# Altium PCB SHORTFINDER.PcbDoc
Units mm, origin at the board's own origin, x right, y up, seen from the top; angles counter-clockwise.
Board outline 152.4 x 101.6 mm, 2 copper layers (Top Layer, Bottom Layer); 39 components, 0 nets, 626 pads, 0 vias.
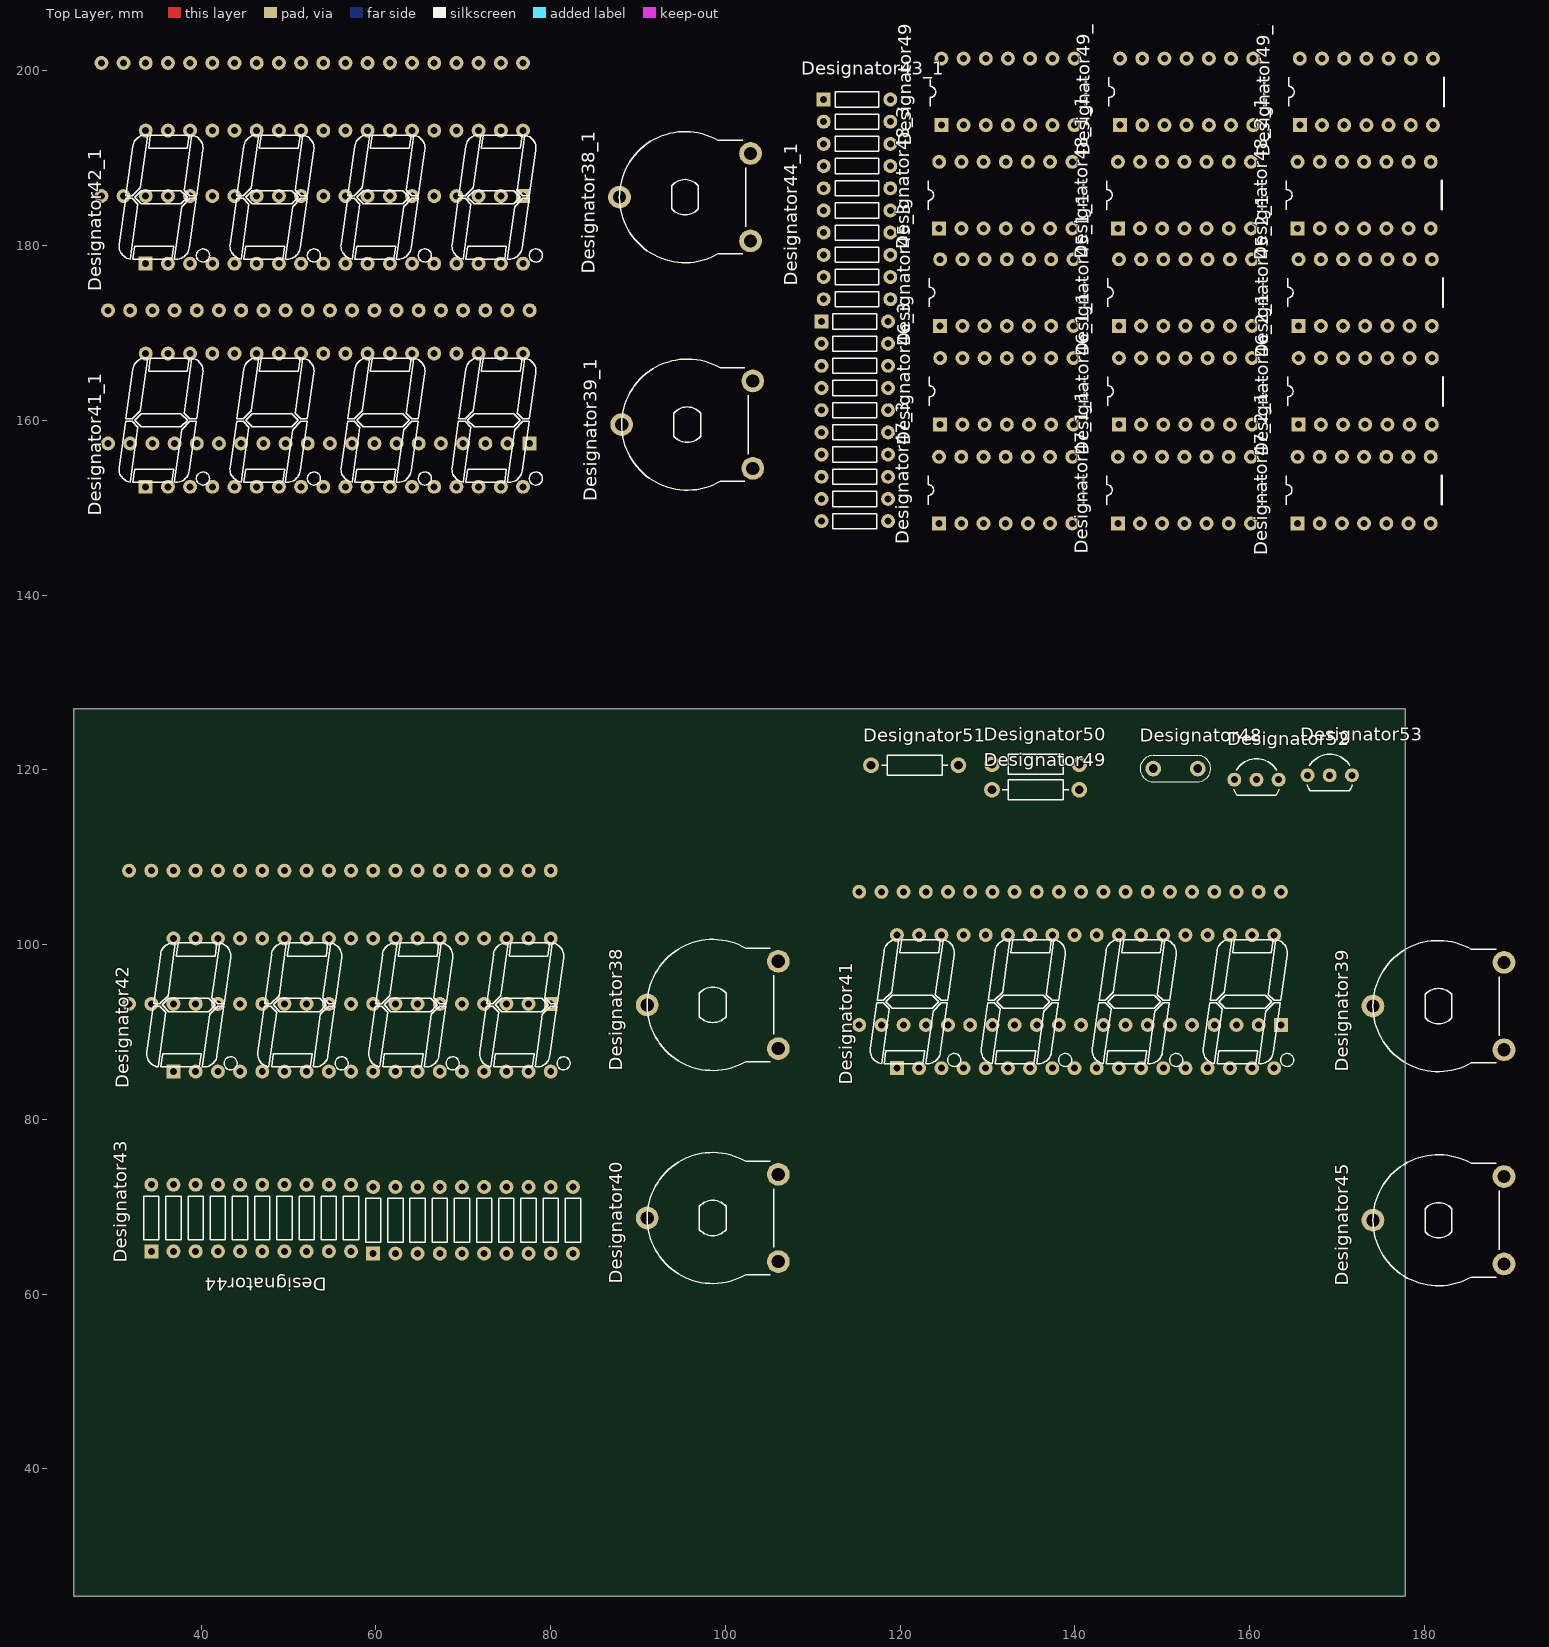
[diagram p0: Top Layer view]
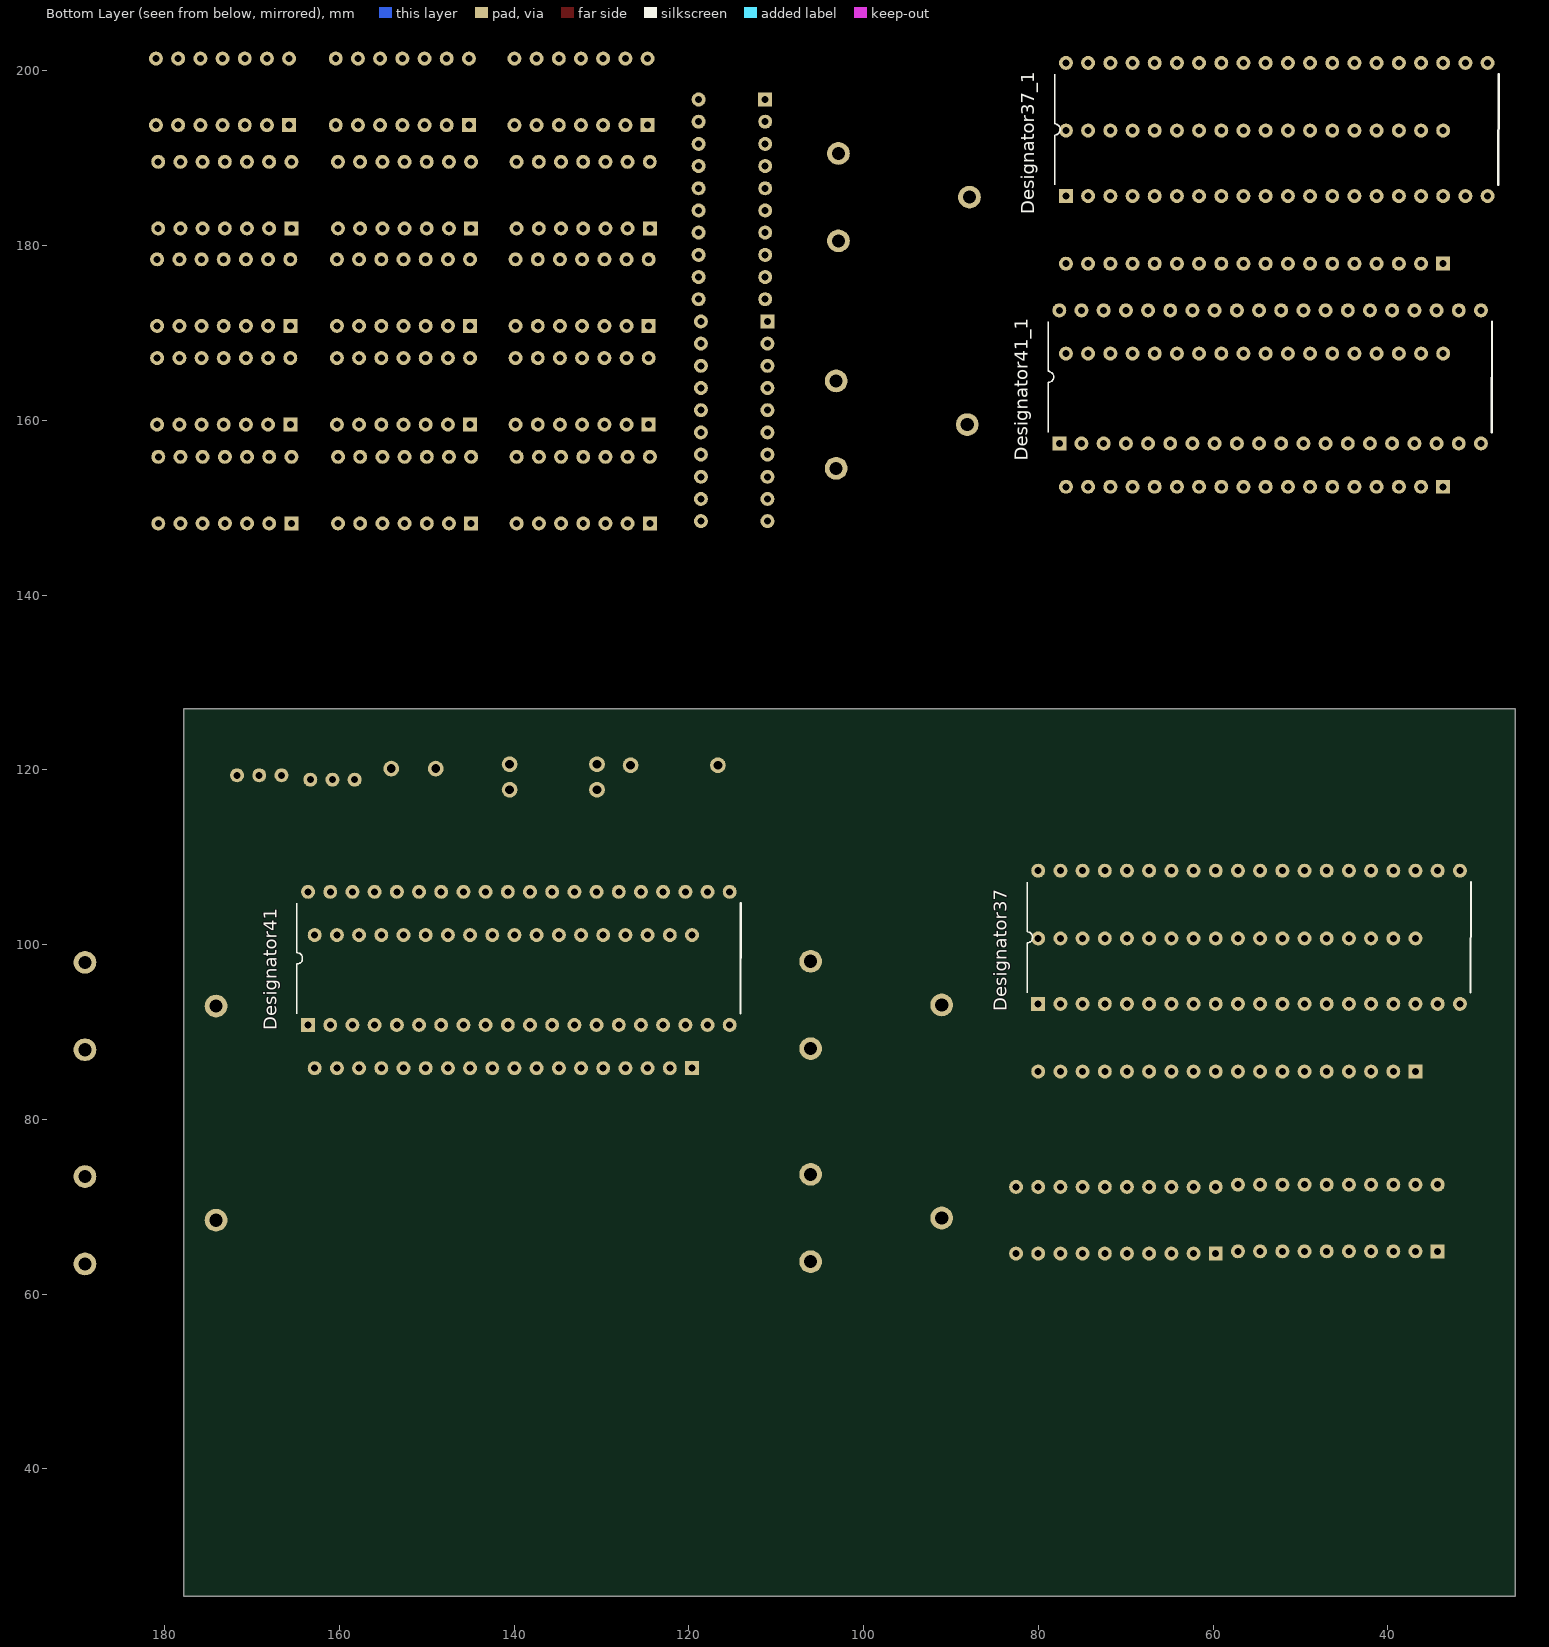
[diagram p1: Bottom Layer view, seen from below]

## Layer stack, top to bottom
Top Solder: solder mask 0.0102, Solder Resist, Dk 3.5
Top Layer: signal copper 0.0356
Dielectric 1: dielectric 0.32, FR-4, Dk 4.8
Bottom Layer: signal copper 0.0356
Bottom Solder: solder mask 0.0102, Solder Resist, Dk 3.5

## Board outline
25.4,25.4 177.8,25.4 177.8,127 25.4,127

## Design rules (kind name [scope] priority, off if disabled: settings)
Clearance [All] p1: gap=0.254 ignorepadtopadclearanceinfootprint=FALSE
PolygonConnect [All] p1: connectstyle=Relief reliefconductorwidth=0.254 reliefentries=4 polygonreliefangle="90 Angle" airgapwidth=0.254
RoutingVias [All] p1: holewidth=0.711 width=1.27 viastyle="Through Hole" minholewidth=0.711 minwidth=1.27 maxholewidth=0.711 maxwidth=1.27
SolderMaskExpansion [All] p1: expansion=0.102 istentingtop=FALSE
Width [All] p1: maxlimit=0.254 minlimit=0.254 preferedwidth=0.254
30 further rules are at their usual default settings.

## Components (designator, comment, footprint, x,y, rotation, side; value= is the part's Value field where it differs from the comment)
Designator37 "Comment" DIP40W 55.88,100.838 r90 bottom
Designator37_1 "Comment" DIP40W 52.705,193.294 r90 bottom
Designator38 "Comment" POT-PIHER-PTNV15 98.552,93.091 r90 top
Designator38_1 "Comment" POT-PIHER-PTNV15 95.377,185.547 r90 top
Designator39 "Comment" POT-PIHER-PTNV15 181.61,92.964 r90 top
Designator39_1 "Comment" POT-PIHER-PTNV15 95.631,159.512 r90 top
Designator40 "Comment" POT-PIHER-PTNV15 98.552,68.707 r90 top
Designator41 "Comment" DISPLAY-LED-QUAD7 141.224,93.472 r90 top
Designator41 "Comment" DIP40W 139.446,98.425 r90 bottom
Designator41_1 "Comment" DIP40W 53.467,164.973 r90 bottom
Designator41_1 "Comment" DISPLAY-LED-QUAD7 55.245,160.02 r90 top
Designator42 "Comment" DISPLAY-LED-QUAD7 58.42,93.091 r90 top
Designator42_1 "Comment" DISPLAY-LED-QUAD7 55.245,185.547 r90 top
Designator43 "Comment" LED-BAR-10X 45.72,68.707 r90 top
Designator43_1 "Comment" LED-BAR-10X 115.062,185.293 r0 top
Designator44 "Comment" LED-BAR-10X 71.12,68.453 r90 top
Designator44_1 "Comment" LED-BAR-10X 114.808,159.893 r0 top
Designator45 "Comment" POT-PIHER-PTNV15 181.61,68.453 r90 top
Designator45_1_1 "Comment" DIP14 152.654,174.625 r90 top
Designator45_2_1 "Comment" DIP14 173.228,174.625 r90 top
Designator45_3 "Comment" DIP14 132.207,174.625 r90 top
Designator46_1_1 "Comment" DIP14 152.654,163.322 r90 top
Designator46_2_1 "Comment" DIP14 173.228,163.322 r90 top
Designator46_3 "Comment" DIP14 132.207,163.322 r90 top
Designator47_1_1 "Comment" DIP14 152.527,152.019 r90 top
Designator47_2_1 "Comment" DIP14 173.101,152.019 r90 top
Designator47_3 "Comment" DIP14 132.08,152.019 r90 top
Designator48 "Comment" CAP-CER-5MM 151.511,120.142 r0 top
Designator48_1_1 "Comment" DIP14 152.534,185.783 r90 top
Designator48_2_1 "Comment" DIP14 173.108,185.783 r90 top
Designator48_3 "Comment" DIP14 132.087,185.783 r90 top
Designator49 "Comment" RES-10MM 135.509,117.729 r0 top
Designator49_1_1 "Comment" DIP14 152.788,197.594 r90 top
Designator49_2_1 "Comment" DIP14 173.362,197.594 r90 top
Designator49_3 "Comment" DIP14 132.341,197.594 r90 top
Designator50 "Comment" RES-10MM 135.509,120.65 r0 top
Designator51 "Comment" RES-10MM 121.666,120.523 r0 top
Designator52 "Comment" TO92A 160.782,118.872 r0 top
Designator53 "Comment" TO92A 169.164,119.38 r0 top

## Footprints (in the part's own frame and the unit in brackets; to place one, negate y for a bottom-side part, rotate by r counter-clockwise, add the part's x,y. Pads: shape width x height; smd on the part's side, far side on the other; paste and mask are expansions set on the pad)
CAP-CER-5MM [mm]
  round 1.8 hole 1 mask+0.1: 1(-2.54,0) 2(2.54,0)
  silkscreen extent -4.04,-1.5 4.04,1.5, body extent -2.8,-1.25 2.8,1.25, height 5.5
DIP14 [mm]
  rect 1.6x1.6 hole 0.8 mask+0.1: 1(-3.81,7.62)
  round 1.6 hole 0.8 mask+0.1: 2(-3.81,5.08) 3(-3.81,2.54) 4(-3.81,0) 5(-3.81,-2.54) 6(-3.81,-5.08) 7(-3.81,-7.62) 8(3.81,-7.62) 9(3.81,-5.08) 10(3.81,-2.54) 11(3.81,0) 12(3.81,2.54) 13(3.81,5.08) 14(3.81,7.62)
  silkscreen extent -1.65,-8.89 1.65,8.89, body extent -3.93,-9.8 3.94,9.8, height 4.36
DIP40W [mm]
  rect 1.6x1.6 hole 0.8 mask+0.1: 1(-7.62,24.13)
  round 1.6 hole 0.8 mask+0.1: 2(-7.62,21.59) 3(-7.62,19.05) 4(-7.62,16.51) 5(-7.62,13.97) 6(-7.62,11.43) 7(-7.62,8.89) 8(-7.62,6.35) 9(-7.62,3.81) 10(-7.62,1.27) 11(-7.62,-1.27) 12(-7.62,-3.81) 13(-7.62,-6.35) 14(-7.62,-8.89) 15(-7.62,-11.43) 16(-7.62,-13.97) 17(-7.62,-16.51) 18(-7.62,-19.05) 19(-7.62,-21.59) 20(-7.62,-24.13) 21(7.62,-24.13) 22(7.62,-21.59) 23(7.62,-19.05) 24(7.62,-16.51) 25(7.62,-13.97) 26(7.62,-11.43) 27(7.62,-8.89) 28(7.62,-6.35) 29(7.62,-3.81) 30(7.62,-1.27) 31(7.62,1.27) 32(7.62,3.81) 33(7.62,6.35) 34(7.62,8.89) 35(7.62,11.43) 36(7.62,13.97) 37(7.62,16.51) 38(7.62,19.05) 39(7.62,21.59) 40(7.62,24.13)
  silkscreen extent -6.32,-25.4 6.32,25.41, body extent -7.75,-26.2 7.75,26.2, height 5
DISPLAY-LED-QUAD7 [mm]
  rect 1.6x1.6 hole 0.8 mask+0.1: 1(-7.62,21.59)
  round 1.6 hole 0.8 mask+0.1: 2(-7.62,19.05) 3(-7.62,16.51) 4(-7.62,13.97) 5(-7.62,11.43) 6(-7.62,8.89) 7(-7.62,6.35) 8(-7.62,3.81) 9(-7.62,1.27) 10(-7.62,-1.27) 11(-7.62,-3.81) 12(-7.62,-6.35) 13(-7.62,-8.89) 14(-7.62,-11.43) 15(-7.62,-13.97) 16(-7.62,-16.51) 17(-7.62,-19.05) 18(-7.62,-21.59) 19(7.62,-21.59) 20(7.62,-19.05) 21(7.62,-16.51) 22(7.62,-13.97) 23(7.62,-11.43) 24(7.62,-8.89) 25(7.62,-6.35) 26(7.62,-3.81) 27(7.62,-1.27) 28(7.62,1.27) 29(7.62,3.81) 30(7.62,6.35) 31(7.62,8.89) 32(7.62,11.43) 33(7.62,13.97) 34(7.62,16.51) 35(7.62,19.05) 36(7.62,21.59)
  silkscreen extent -7.43,-23.81 7.11,24.65, body extent -9.5,-25.15 9.5,25.15, height 8.11
LED-BAR-10X [mm]
  rect 1.6x1.6 hole 0.8 mask+0.1: 1(-3.81,11.43)
  round 1.6 hole 0.8 mask+0.1: 2(-3.81,8.89) 3(-3.81,6.35) 4(-3.81,3.81) 5(-3.81,1.27) 6(-3.81,-1.27) 7(-3.81,-3.81) 8(-3.81,-6.35) 9(-3.81,-8.89) 10(-3.81,-11.43) 11(3.81,-11.43) 12(3.81,-8.89) 13(3.81,-6.35) 14(3.81,-3.81) 15(3.81,-1.27) 16(3.81,1.27) 17(3.81,3.81) 18(3.81,6.35) 19(3.81,8.89) 20(3.81,11.43)
  silkscreen extent -2.5,-12.3 2.5,12.3, body extent -5.08,-12.7 5.08,12.7, height 6.8
POT-PIHER-PTNV15 [mm]
  round 2.6 hole 1.5 mask+0.1: 1(-5,-7.5) 2(0,7.5) 3(5,-7.5)
  silkscreen extent -7.5,-6.98 7.5,7.5, body extent -7.5,-7.8 7.5,7.65, height 7.02
RES-10MM [mm]
  round 1.8 hole 1 mask+0.1: 1(-5,0) 2(5,0)
  silkscreen extent -3.8,-1.15 3.8,1.15, body extent -5.25,-1.29 5.25,1.29, height 2.67
TO92A [mm]
  round 1.6 hole 0.8 mask+0.1: 1(-2.54,0) 2(0,0) 3(2.54,0)
  silkscreen extent -2.59,-1.8 2.59,2.4, body extent -2.8,-1.7 2.8,2.23, height 9.7

## Nets (pads, with @x,y where several pads share a name; then routed paths per layer and width w, separated by ;. In a path a pad name is that pad's centre, name@x,y a point inside that pad or via, vN(x,y) a via of type N, cw(c..) or ccw(c..) an arc to the next point about the centre after c; other vN are vias at no path point)
pads on no net: Designator37.1 Designator37.2 Designator37.3 Designator37.4 Designator37.5 Designator37.6 Designator37.7 Designator37.8 Designator37.9 Designator37.10 Designator37.11 Designator37.12 Designator37.13 Designator37.14 Designator37.15 Designator37.16 Designator37.17 Designator37.18 Designator37.19 Designator37.20 Designator37.21 Designator37.22 Designator37.23 Designator37.24 Designator37.25 Designator37.26 Designator37.27 Designator37.28 Designator37.29 Designator37.30 Designator37.31 Designator37.32 Designator37.33 Designator37.34 Designator37.35 Designator37.36 Designator37.37 Designator37.38 Designator37.39 Designator37.40 Designator37_1.1 Designator37_1.2 Designator37_1.3 Designator37_1.4 Designator37_1.5 Designator37_1.6 Designator37_1.7 Designator37_1.8 Designator37_1.9 Designator37_1.10 Designator37_1.11 Designator37_1.12 Designator37_1.13 Designator37_1.14 Designator37_1.15 Designator37_1.16 Designator37_1.17 Designator37_1.18 Designator37_1.19 Designator37_1.20 Designator37_1.21 Designator37_1.22 Designator37_1.23 Designator37_1.24 Designator37_1.25 Designator37_1.26 Designator37_1.27 Designator37_1.28 Designator37_1.29 Designator37_1.30 Designator37_1.31 Designator37_1.32 Designator37_1.33 Designator37_1.34 Designator37_1.35 Designator37_1.36 Designator37_1.37 Designator37_1.38 Designator37_1.39 Designator37_1.40 Designator38.1 Designator38.2 Designator38.3 Designator38_1.1 Designator38_1.2 Designator38_1.3 Designator39.1 Designator39.2 Designator39.3 Designator39_1.1 Designator39_1.2 Designator39_1.3 Designator40.1 Designator40.2 Designator40.3 Designator41.1 Designator41.2 Designator41.3 Designator41.4 Designator41.5 Designator41.6 Designator41.7 Designator41.8 Designator41.9 Designator41.10 Designator41.11 Designator41.12 Designator41.13 Designator41.14 Designator41.15 Designator41.16 Designator41.17 Designator41.18 Designator41.19 Designator41.20 Designator41.21 Designator41.22 Designator41.23 Designator41.24 Designator41.25 Designator41.26 Designator41.27 Designator41.28 Designator41.29 Designator41.30 Designator41.31 Designator41.32 Designator41.33 Designator41.34 Designator41.35 Designator41.36 Designator41.37 Designator41.38 Designator41.39 Designator41.40 Designator41_1.1 Designator41_1.2 Designator41_1.3 Designator41_1.4 Designator41_1.5 Designator41_1.6 Designator41_1.7 Designator41_1.8 Designator41_1.9 Designator41_1.10 Designator41_1.11 Designator41_1.12 Designator41_1.13 Designator41_1.14 Designator41_1.15 Designator41_1.16 Designator41_1.17 Designator41_1.18 Designator41_1.19 Designator41_1.20 Designator41_1.21 Designator41_1.22 Designator41_1.23 Designator41_1.24 Designator41_1.25 Designator41_1.26 Designator41_1.27 Designator41_1.28 Designator41_1.29 Designator41_1.30 Designator41_1.31 Designator41_1.32 Designator41_1.33 Designator41_1.34 Designator41_1.35 Designator41_1.36 Designator41_1.37 Designator41_1.38 Designator41_1.39 Designator41_1.40 Designator42.1 Designator42.2 Designator42.3 Designator42.4 Designator42.5 Designator42.6 Designator42.7 Designator42.8 Designator42.9 Designator42.10 Designator42.11 Designator42.12 Designator42.13 Designator42.14 Designator42.15 Designator42.16 Designator42.17 Designator42.18 Designator42.19 Designator42.20 Designator42.21 Designator42.22 Designator42.23 Designator42.24 Designator42.25 Designator42.26 Designator42.27 Designator42.28 Designator42.29 Designator42.30 Designator42.31 Designator42.32 Designator42.33 Designator42.34 Designator42.35 Designator42.36 Designator42_1.1 Designator42_1.2 Designator42_1.3 Designator42_1.4 Designator42_1.5 Designator42_1.6 Designator42_1.7 Designator42_1.8 Designator42_1.9 Designator42_1.10 Designator42_1.11 Designator42_1.12 Designator42_1.13 Designator42_1.14 Designator42_1.15 Designator42_1.16 Designator42_1.17 Designator42_1.18 Designator42_1.19 Designator42_1.20 Designator42_1.21 Designator42_1.22 Designator42_1.23 Designator42_1.24 Designator42_1.25 Designator42_1.26 Designator42_1.27 Designator42_1.28 Designator42_1.29 Designator42_1.30 Designator42_1.31 Designator42_1.32 Designator42_1.33 Designator42_1.34 Designator42_1.35 Designator42_1.36 Designator43.1 Designator43.2 Designator43.3 Designator43.4 Designator43.5 Designator43.6 Designator43.7 Designator43.8 Designator43.9 Designator43.10 Designator43.11 Designator43.12 Designator43.13 Designator43.14 Designator43.15 Designator43.16 Designator43.17 Designator43.18 Designator43.19 Designator43.20 Designator43_1.1 Designator43_1.2 Designator43_1.3 Designator43_1.4 Designator43_1.5 Designator43_1.6 Designator43_1.7 Designator43_1.8 Designator43_1.9 Designator43_1.10 Designator43_1.11 Designator43_1.12 Designator43_1.13 Designator43_1.14 Designator43_1.15 Designator43_1.16 Designator43_1.17 Designator43_1.18 Designator43_1.19 Designator43_1.20 Designator44.1 Designator44.2 Designator44.3 Designator44.4 Designator44.5 Designator44.6 Designator44.7 Designator44.8 Designator44.9 Designator44.10 Designator44.11 Designator44.12 Designator44.13 Designator44.14 Designator44.15 Designator44.16 Designator44.17 Designator44.18 Designator44.19 Designator44.20 Designator44_1.1 Designator44_1.2 Designator44_1.3 Designator44_1.4 Designator44_1.5 Designator44_1.6 Designator44_1.7 Designator44_1.8 Designator44_1.9 Designator44_1.10 Designator44_1.11 Designator44_1.12 Designator44_1.13 Designator44_1.14 Designator44_1.15 Designator44_1.16 Designator44_1.17 Designator44_1.18 Designator44_1.19 Designator44_1.20 Designator45.1 Designator45.2 Designator45.3 Designator45_1_1.1 Designator45_1_1.2 Designator45_1_1.3 Designator45_1_1.4 Designator45_1_1.5 Designator45_1_1.6 Designator45_1_1.7 Designator45_1_1.8 Designator45_1_1.9 Designator45_1_1.10 Designator45_1_1.11 Designator45_1_1.12 Designator45_1_1.13 Designator45_1_1.14 Designator45_2_1.1 Designator45_2_1.2 Designator45_2_1.3 Designator45_2_1.4 Designator45_2_1.5 Designator45_2_1.6 Designator45_2_1.7 Designator45_2_1.8 Designator45_2_1.9 Designator45_2_1.10 Designator45_2_1.11 Designator45_2_1.12 Designator45_2_1.13 Designator45_2_1.14 Designator45_3.1 Designator45_3.2 Designator45_3.3 Designator45_3.4 Designator45_3.5 Designator45_3.6 Designator45_3.7 Designator45_3.8 Designator45_3.9 Designator45_3.10 Designator45_3.11 Designator45_3.12 Designator45_3.13 Designator45_3.14 Designator46_1_1.1 Designator46_1_1.2 Designator46_1_1.3 Designator46_1_1.4 Designator46_1_1.5 Designator46_1_1.6 Designator46_1_1.7 Designator46_1_1.8 Designator46_1_1.9 Designator46_1_1.10 Designator46_1_1.11 Designator46_1_1.12 Designator46_1_1.13 Designator46_1_1.14 Designator46_2_1.1 Designator46_2_1.2 Designator46_2_1.3 Designator46_2_1.4 Designator46_2_1.5 Designator46_2_1.6 Designator46_2_1.7 Designator46_2_1.8 Designator46_2_1.9 Designator46_2_1.10 Designator46_2_1.11 Designator46_2_1.12 Designator46_2_1.13 Designator46_2_1.14 Designator46_3.1 Designator46_3.2 Designator46_3.3 Designator46_3.4 Designator46_3.5 Designator46_3.6 Designator46_3.7 Designator46_3.8 Designator46_3.9 Designator46_3.10 Designator46_3.11 Designator46_3.12 Designator46_3.13 Designator46_3.14 Designator47_1_1.1 Designator47_1_1.2 Designator47_1_1.3 Designator47_1_1.4 Designator47_1_1.5 Designator47_1_1.6 Designator47_1_1.7 Designator47_1_1.8 Designator47_1_1.9 Designator47_1_1.10 Designator47_1_1.11 Designator47_1_1.12 Designator47_1_1.13 Designator47_1_1.14 Designator47_2_1.1 Designator47_2_1.2 Designator47_2_1.3 Designator47_2_1.4 Designator47_2_1.5 Designator47_2_1.6 Designator47_2_1.7 Designator47_2_1.8 Designator47_2_1.9 Designator47_2_1.10 Designator47_2_1.11 Designator47_2_1.12 Designator47_2_1.13 Designator47_2_1.14 Designator47_3.1 Designator47_3.2 Designator47_3.3 Designator47_3.4 Designator47_3.5 Designator47_3.6 Designator47_3.7 Designator47_3.8 Designator47_3.9 Designator47_3.10 Designator47_3.11 Designator47_3.12 Designator47_3.13 Designator47_3.14 Designator48.1 Designator48.2 Designator48_1_1.1 Designator48_1_1.2 Designator48_1_1.3 Designator48_1_1.4 Designator48_1_1.5 Designator48_1_1.6 Designator48_1_1.7 Designator48_1_1.8 Designator48_1_1.9 Designator48_1_1.10 Designator48_1_1.11 Designator48_1_1.12 Designator48_1_1.13 Designator48_1_1.14 Designator48_2_1.1 Designator48_2_1.2 Designator48_2_1.3 Designator48_2_1.4 Designator48_2_1.5 Designator48_2_1.6 Designator48_2_1.7 Designator48_2_1.8 Designator48_2_1.9 Designator48_2_1.10 Designator48_2_1.11 Designator48_2_1.12 Designator48_2_1.13 Designator48_2_1.14 Designator48_3.1 Designator48_3.2 Designator48_3.3 Designator48_3.4 Designator48_3.5 Designator48_3.6 Designator48_3.7 Designator48_3.8 Designator48_3.9 Designator48_3.10 Designator48_3.11 Designator48_3.12 Designator48_3.13 Designator48_3.14 Designator49.1 Designator49.2 Designator49_1_1.1 Designator49_1_1.2 Designator49_1_1.3 Designator49_1_1.4 Designator49_1_1.5 Designator49_1_1.6 Designator49_1_1.7 Designator49_1_1.8 Designator49_1_1.9 Designator49_1_1.10 Designator49_1_1.11 Designator49_1_1.12 Designator49_1_1.13 Designator49_1_1.14 Designator49_2_1.1 Designator49_2_1.2 Designator49_2_1.3 Designator49_2_1.4 Designator49_2_1.5 Designator49_2_1.6 Designator49_2_1.7 Designator49_2_1.8 Designator49_2_1.9 Designator49_2_1.10 Designator49_2_1.11 Designator49_2_1.12 Designator49_2_1.13 Designator49_2_1.14 Designator49_3.1 Designator49_3.2 Designator49_3.3 Designator49_3.4 Designator49_3.5 Designator49_3.6 Designator49_3.7 Designator49_3.8 Designator49_3.9 Designator49_3.10 Designator49_3.11 Designator49_3.12 Designator49_3.13 Designator49_3.14 Designator50.1 Designator50.2 Designator51.1 Designator51.2 Designator52.1 Designator52.2 Designator52.3 Designator53.1 Designator53.2 Designator53.3